# EAGLE board prefab (EAGLE 7.4.0)

Size 78 x 77 mm. Coordinates in mm from the lower left corner, seen from the top.
Outline: 0,0 78,0 78,77 0,77 0,0
Copper layers (1*16): Top 0.035mm / dielectric 1.5mm / Bottom 0.035mm
Design rules "default": minimum track width 10mil, minimum drill 24mil, track to track 8mil, track to pad 8mil, pad to pad 8mil, via to via 8mil, smd to smd 8mil, copper to edge 40mil, drill to drill 8mil, minimum pad ring 10mil, minimum via ring 8mil, stop-mask expansion 4mil, vias tented up to drill 0mil, thermal gap 10mil

## Footprints (pad centres in the part's own frame; a part is rotated, then mirrored left to right if it is on the bottom)
LED-1206 = smd 1.2 x 1.4: A -1.5,0; C 1.5,0

## Placement (x,y rotation side)
LED1  [LED-1206]  18.94,58.58 0 top
LED2  [LED-1206]  12.59,49.69 0 top
LED3  [LED-1206]  12.59,26.83 0 top
LED4  [LED-1206]  18.94,17.94 0 top
LED5  [LED-1206]  30.37,10.32 90 top
LED6  [LED-1206]  53.23,12.86 90 top
LED7  [LED-1206]  65.93,25.56 180 top
LED8  [LED-1206]  66.2,48.42 180 top
LED9  [LED-1206]  57.04,61.12 180 top
LED10  [LED-1206]  37.99,67.47 270 top

## Library data of the parts
LED1-LED10 = LilyPad-Wearables

## Nets
N$1: LED1.A LED2.A LED3.A LED4.A LED5.A LED6.A LED7.A LED8.A LED9.A LED10.A
N$2: LED1.C LED2.C LED3.C LED4.C LED5.C LED6.C LED7.C LED8.C LED9.C LED10.C

## Tracks (layer width: path | path; a pad name or v marks a point on that pad's centre or on a via)
N$1  (9 unrouted)
N$2  (9 unrouted)
(copper drawn outside any net)
  shapes: Bottom circle x2, Top circle x2